# Altium PCB nPOC-BB_beta_heater-board.PcbDoc
Units mm, origin at the board's own origin, x right, y up, seen from the top; angles counter-clockwise.
Board outline 31.75 x 55.17 mm, 2 copper layers (Top Layer, Bottom Layer), stack 1.524 mm thick; 3 components, 5 nets, 73 pads, 12 vias.
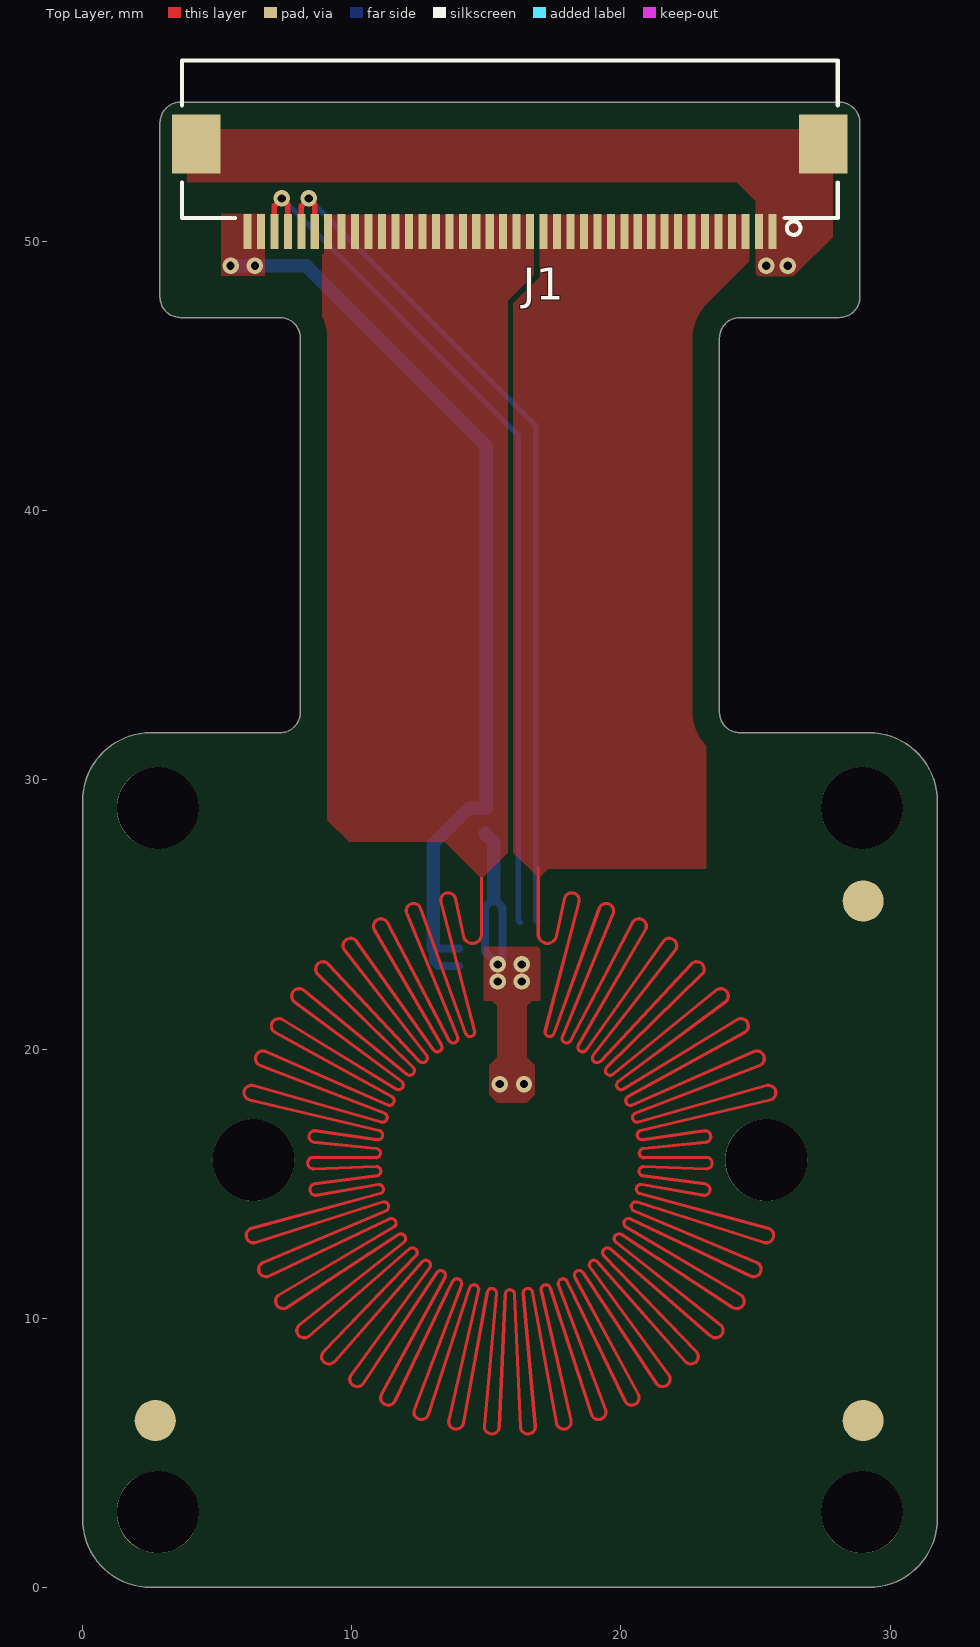
[diagram p0: Top Layer view]
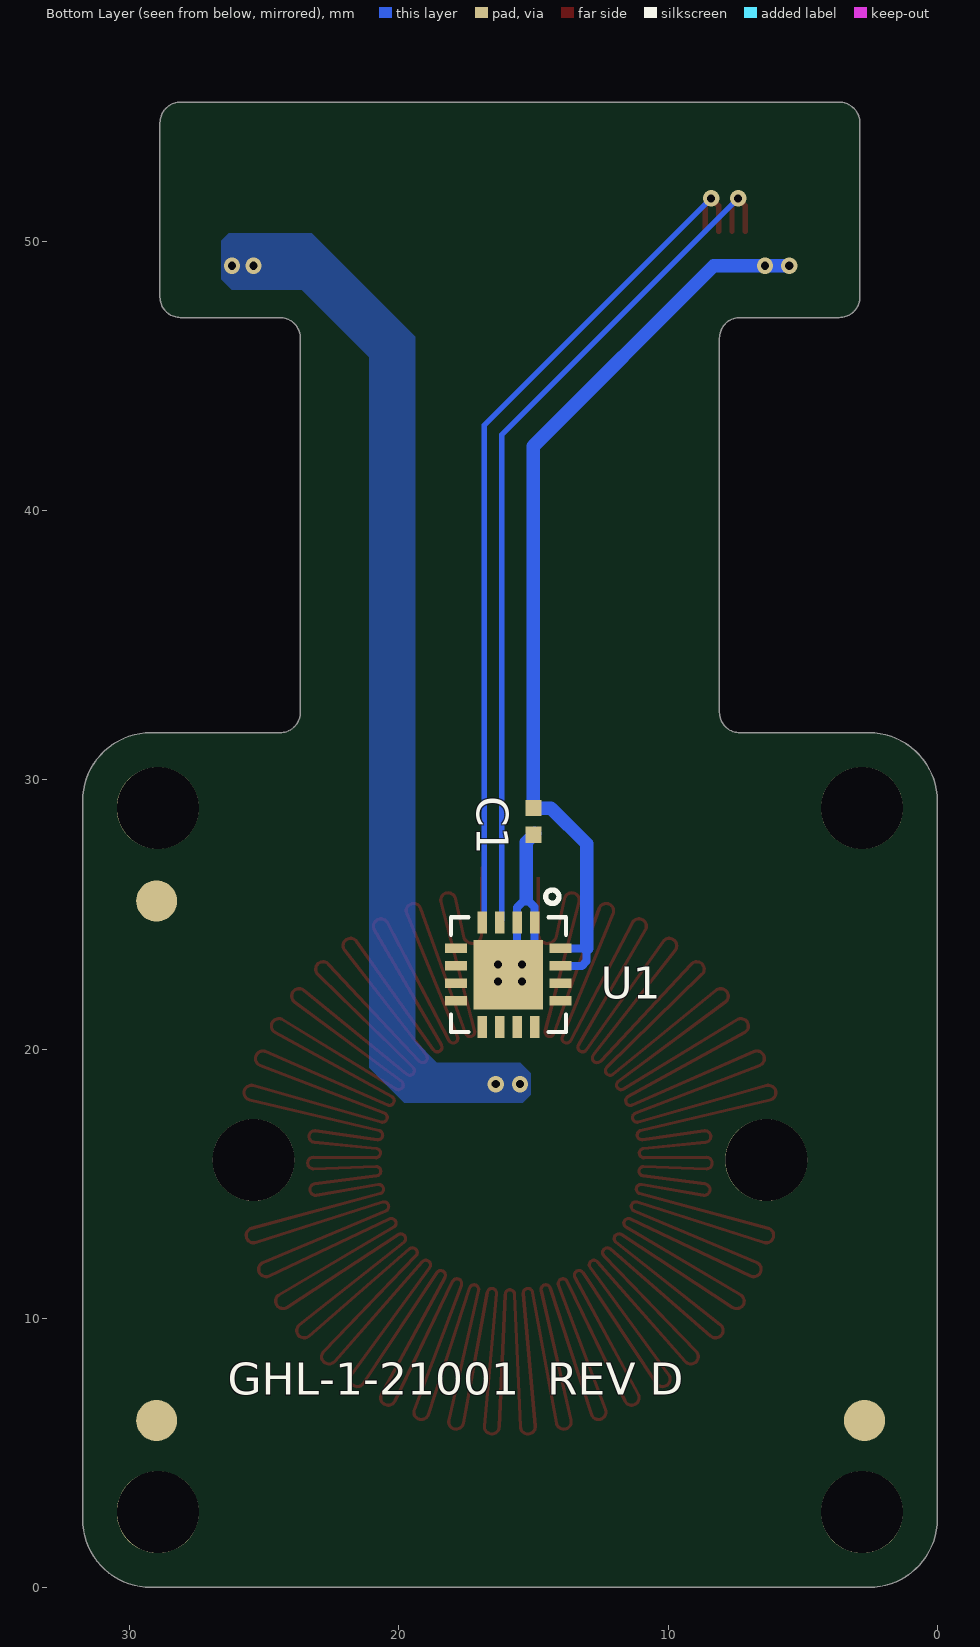
[diagram p1: Bottom Layer view, seen from below]

## Layer stack, top to bottom
Top Solder Mask: solder mask 0.0254, SM-003, Dk 4
Top Layer: signal copper 0.035
Dielectric 1: prepreg 1.4542, PP-023, Dk 4.5
Bottom Layer: signal copper 0.035
Bottom Solder Mask: solder mask 0.0254, SM-001, Dk 4

## Board outline
0,2.54 ccw(c2.54,2.54) 2.54,0 29.21,0 ccw(c29.21,2.54) 31.75,2.54 31.75,29.21 ccw(c29.21,29.21) 29.21,31.75 24.422,31.75 cw(c24.422,32.512) 23.66,32.512 23.66,46.412 cw(c24.422,46.412) 24.422,47.174 28.113,47.174 ccw(c28.113,47.936) 28.875,47.936 28.875,54.412 ccw(c28.113,54.412) 28.113,55.174 3.637,55.174 ccw(c3.637,54.412) 2.875,54.412 2.875,47.936 ccw(c3.637,47.936) 3.637,47.174 7.328,47.174 cw(c7.328,46.412) 8.09,46.412 8.09,32.512 cw(c7.328,32.512) 7.328,31.75 2.54,31.75 ccw(c2.54,29.21) 0,29.21

## Design rules (kind name [scope] priority, off if disabled: settings)
BoardOutlineClearance [All] p1: gap=1 ignorepadtopadclearanceinfootprint=FALSE except(0: Arc-SplitContinuation Track-SplitContinuation SMDPad-SplitContinuation THPad-SplitContinuation Via-SplitContinuation Fill-SplitContinuation Poly-SplitContinuation Region-SplitContinuation Text-SplitContinuation; 0.864: Track-OutlineEdge Via-OutlineEdge)
Clearance [All] p1: gap=0.203 ignorepadtopadclearanceinfootprint=FALSE except(0.381: Arc-Hole Track-Hole SMDPad-Hole THPad-Hole Via-Hole Fill-Hole Poly-Hole Region-Hole Text-Hole)
HoleSize [All] p1: absolutevalues=TRUE maxlimit=5.08 minlimit=0.025 maxpercent=80.000 minpercent=20.000
MinimumSolderMaskSliver [All] p1: minsoldermaskwidth=0.102
PolygonConnect PolygonConnect_2 [All vs IsNamedPolygon('NONET_L-01_P-001')] p1: thpad.connectstyle=Relief thpad.reliefconductorwidth=0.254 thpad.reliefentries=4 thpad.polygonreliefangle="90 Angle" thpad.airgapwidth=0.254 smdpad.connectstyle=Direct smdpad.reliefconductorwidth=0.254 smdpad.reliefentries=4 smdpad.polygonreliefangle="90 Angle" smdpad.airgapwidth=0.254 via.connectstyle=Direct via.reliefconductorwidth=0.254 via.reliefentries=4 via.polygonreliefangle="90 Angle" via.airgapwidth=0.254
PolygonConnect PolygonConnect_1 [All vs IsNamedPolygon('GND_L02_P000')] p2: thpad.connectstyle=Relief thpad.reliefconductorwidth=0.254 thpad.reliefentries=4 thpad.polygonreliefangle="90 Angle" thpad.airgapwidth=0.254 smdpad.connectstyle=Direct smdpad.reliefconductorwidth=0.254 smdpad.reliefentries=4 smdpad.polygonreliefangle="90 Angle" smdpad.airgapwidth=0.254 via.connectstyle=Direct via.reliefconductorwidth=0.254 via.reliefentries=4 via.polygonreliefangle="90 Angle" via.airgapwidth=0.254
PolygonConnect [All] p3: connectstyle=Relief reliefconductorwidth=0.254 reliefentries=4 polygonreliefangle="90 Angle" airgapwidth=0.254
RoutingVias [All] p1: holewidth=0.305 width=0.61 viastyle="Through Hole" minholewidth=0.305 minwidth=0.61 maxholewidth=0.305 maxwidth=0.61
SilkToSilkClearance [All] p1: silktosilkclearance=0.102
SilkToSolderMaskClearance [IsPad] p1: minsilkscreentomaskgap=0.102 clearancetoexposedcopper=TRUE
SolderMaskExpansion [All] p1: expansion=0.064 istentingtop=FALSE
SupplyNets "Schematic Supply Nets_1" [InNet('VDD')] p1: voltage=0.000
SupplyNets "Schematic Supply Nets" [InNet('GND')] p2: voltage=0.000
Width [All] p1: maxlimit=1.27 minlimit=0.102 preferedwidth=0.203 minimp=50.000000 maximp=50.000000 favimp=50.000000
26 further rules are at their usual default settings.

## Components (designator, comment, footprint, x,y, rotation, side; value= is the part's Value field where it differs from the comment)
C1 "100nF" C0402 15,28.46 r90 bottom
J1 "FH12A-40S-0.5SH(55)" hirose_fh12a-40s-0p5sh55 15.875,53.8 r0 top
U1 "G-NICO-018" QFN16_4X4_P65mm 15.932,22.762 r270 bottom

## Footprints (in the part's own frame and the unit in brackets; to place one, negate y for a bottom-side part, rotate by r counter-clockwise, add the part's x,y. Pads: shape width x height; smd on the part's side, far side on the other; paste and mask are expansions set on the pad)
C0402 [mil] "C0402"
  rect 23.62x23.62 smd: 1(-19.69,0) 2(19.68,0)
  body extent -20,-10 20,10, height 14
hirose_fh12a-40s-0p5sh55 [mm] "Hirose FH12A Series 0.5mm pitch top contact FPC/FFC 40pin"
  rect 0.3x1.3 smd: 1(9.75,-3.429) 2(9.25,-3.429) 3(8.75,-3.429) 4(8.25,-3.429) 5(7.75,-3.429) 6(7.25,-3.429) 7(6.75,-3.429) 8(6.25,-3.429) 9(5.75,-3.429) 10(5.25,-3.429) 11(4.75,-3.429) 12(4.25,-3.429) 13(3.75,-3.429) 14(3.25,-3.429) 15(2.75,-3.429) 16(2.25,-3.429) 17(1.75,-3.429) 18(1.25,-3.429) 19(0.75,-3.429) 20(0.25,-3.429) 21(-0.25,-3.429) 22(-0.75,-3.429) 23(-1.25,-3.429) 24(-1.75,-3.429) 25(-2.25,-3.429) 26(-2.75,-3.429) 27(-3.25,-3.429) 28(-3.75,-3.429) 29(-4.25,-3.429) 30(-4.75,-3.429) 31(-5.25,-3.429) 32(-5.75,-3.429) 33(-6.25,-3.429) 34(-6.75,-3.429) 35(-7.25,-3.429) 36(-7.75,-3.429) 37(-8.25,-3.429) 38(-8.75,-3.429) 39(-9.25,-3.429) 40(-9.75,-3.429)
  rect 1.8x2.2 smd: 41(-11.646,-0.178) 42(11.646,-0.178)
  silkscreen extent -12.18,-3.56 12.18,2.92, body extent -12.25,-4.06 12.25,2.94, height 2.05
QFN16_4X4_P65mm [mil] "QFN 16 pin 4x4mm 0.65 pin pitch 0.9 Height"
  rect 32x14 smd: 1(-76.5,38.39) 2(-76.5,12.8) 3(-76.5,-12.8) 4(-76.5,-38.39) 9(76.5,-38.39) 10(76.5,-12.8) 11(76.5,12.8) 12(76.5,38.39)
  rect 14x32 smd: 5(-38.39,-76.5) 6(-12.8,-76.5) 7(12.8,-76.5) 8(38.39,-76.5) 13(38.39,76.5) 14(12.8,76.5) 15(-12.8,76.5) 16(-38.39,76.5)
  rect 102x102 smd paste-50.5 mask+0: 17(0,0)
  silkscreen extent -124,-84 84,84, body extent -80,-80 80,80, height 35

## Part data
C1: library part CMP-00446-1, "Ceramic capacitor SMD 0402 100nF 16V X7R 10%", Case Code (Imperial)=0402, Case Code (Metric)=1005, Dielectric=X7R, Max Operating Temperature=125°C, Min Operating Temperature=-55°C, Package Quantity=1, Tolerance=10%, Voltage=16V, Case/Package=0402, Construction=Flat, Contact Plating=Tin, Depth=0.5mm, Height=0.5mm, Install=POP, Lead Free="Lead Free", Length=1mm, Material=Ceramic, Mounting Technology="Surface Mount", Packaging="Tape and Reel", Radiation Hardening=No, RoHS Compliant=Yes, Series=CL, Thickness=0.022inch, Voltage Rating=16V, Voltage Rating (DC)=16V, Width=0.02inch
J1: library part CMP-002-00023-3, "Conn Ffc/fpc Connector Skt 40 Pos 0.5MM Solder Ra SMD T/r / Conn Ffc Top 40POS 0.50MM R/a", Actuator Color=Brown, Color=Beige,Brown, Contact Resistance=50mR, Contact Voltage Rating (AC)=50V, Current Rating=500mA, Flammability Rating="UL94 V-0", Housing Color=Beige, Insulation Resistance=500MR, Max Current Rating=400mA, Max Operating Temperature=70°C, Min Operating Temperature=-40°C, Package Quantity=2000, Actuator Material=Polyphenylene, Connector Type=Receptacle, Contact Location=Top, Contact Material=Bronze, Contact Pitch=500um, Contact Plating=Gold, Depth=6.2mm, Gender=Female, Housing Material=Polyamide, Lead Free="Lead Free", Lead Pitch=0.5mm, Length=24.5mm, Material=Polyamide, Mating Cycles=20, Max Voltage Rating (AC)=50V, Mounting Technology="Surface Mount", Number of Contacts=40, Number of Positions=40, Number of Rows=1, Orientation="Right Angle", Packaging="Tape and Reel", Pitch=0.5mm, Radiation Hardening=No, Reach SVHC Compliant=No, RoHS Compliant=Yes, Series=FH12, Termination=Solder, Voltage Rating=50V, Voltage Rating (AC)=50V, Width=24.1mm, Wire/Cable Type=Straight
U1: library part CMP-00069-3, "TSYS01 Series 3.6 V -40 to +125 SMT Digital Temperature Sensor - QFN-16", Case/Package=QFN, Max Operating Temperature=125°C, Max Supply Current=12.5uA, Min Operating Temperature=-40°C, Operating Supply Voltage=3.6V, Height=0.85mm, Lead Free="Lead Free", Length=4mm, RoHS Compliant=Yes, Sensor Type=Temperature, Width=0.157inch

## Free pads (board coordinates)
  round 1.524 smd far side paste-2539.97 mask+0.508: 1(2.7,6.2) 1(29,6.2) 1(29,25.5)
  round 1.524 smd paste-2539.97 mask+0.508: 1(2.7,6.2) 1(29,6.2) 1(29,25.5)
  round 3.048 hole 3.048 unplated: 2(2.794,2.794) 2(2.794,28.956) 2(6.35,15.875) 2(25.4,15.875) 2(28.956,2.794) 2(28.956,28.956)

## Via types
v1: diameter 0.61, hole 0.305, Top Layer to Bottom Layer, tented both sides, 12 vias

## Nets (pads, with @x,y where several pads share a name; then routed paths per layer and width w, separated by ;. In a path a pad name is that pad's centre, name@x,y a point inside that pad or via, vN(x,y) a via of type N, cw(c..) or ccw(c..) an arc to the next point about the centre after c; other vN are vias at no path point)
GND: C1.1 J1.1 J1.2 J1.41 J1.42 U1.1 U1.2 U1.17 | length 8
  Bottom Layer w0.3: U1.17@14.957,23.61 v1(15.424,23.143) 15.607,23.326 U1.2 15.607,25.253 15.272,25.588 14.957,25.273 U1.1 U1.17@14.957,23.61
  Bottom Layer w0.5: C1.1@14.95,28 14.95,28.01 15.272,27.688 15.272,25.588
  other v1: 15.5,18.7 16.4,18.7 15.424,22.508 16.313,22.508 16.313,23.143 25.4,49.1 26.2,49.1
HEATER_N: J1.3 J1.4 J1.5 J1.6 J1.7 J1.8 J1.9 J1.10 J1.11 J1.12 J1.13 J1.14 J1.15 J1.16 J1.17 J1.18 J1.19 J1.20 J1.21 J1.22 J1.23 J1.24 J1.25 J1.26 J1.27 J1.28 J1.29 J1.30 J1.31 J1.32 J1.33 J1.34 | length 0.4
  Top Layer w0.102: 16.925,26.375 16.925,26.725
I2C0_SCLK: J1.37 J1.38 U1.3 | length 33.2
  Top Layer w0.203: J1.38 7.125,51.325 v1(7.4,51.6) 7.531,51.469 7.531,51.466 7.625,51.372 J1.37
  Bottom Layer w0.203: v1(7.4,51.6) 16.181,42.819 16.181,24.781 U1.3
I2C0_SDA: J1.35 J1.36 U1.4 | length 33.1
  Top Layer w0.203: J1.36 8.125,51.325 v1(8.4,51.6) 8.625,51.375 J1.35
  Bottom Layer w0.203: v1(8.4,51.6) 16.831,43.169 16.831,24.781 U1.4
VDD: C1.2 J1.39 J1.40 U1.15 U1.16 | length 34.6
  Bottom Layer w0.305: U1.15 13.203,23.087 13.025,23.266 13.025,23.737 U1.16
  Bottom Layer w0.5: v1(5.5,49.1) v1(6.4,49.1) 8.3,49.1 15,42.4 C1.2 14.99,28.95 14.35,28.95 13.025,27.625 13.025,23.737
pads on no net: U1.5 U1.6 U1.7 U1.8 U1.9 U1.10 U1.11 U1.12 U1.13 U1.14

## Polygon pours and split planes (outlines as drawn)
HEATER_N on Top Layer "NONET_L-01_P-001" (solid, remove dead copper, pour order 6): 16.77,51 16.77,48.77 15.8,47.8 15.8,27.3 14.875,26.375 14.773,26.375 13.448,27.7 9.9,27.7 9.099,28.501 9.099,32.512 8.9,32.512 8.9,51
VDD on Top Layer "NONET_L-01_P-001" (solid, remove dead copper, pour order 9): 5.15,51.025 5.15,48.725 6.77,48.725 6.77,51.025
GND on Top Layer "NONET_L-01_P-001" (solid, remove dead copper, pour order 11): 24.3,52.2 25,51.5 25,49.5 25,48.8 25.1,48.7 26.4,48.7 26.5,48.8 28.4,50.7 28.4,54.7 3.5,54.7 3.5,52.2
HEATER_N on Top Layer "NONET_L-01_P-001" (solid, remove dead copper, pour order 7): 16.977,50.998 16.977,48.674 16.001,47.698 16.001,27.299 16.925,26.375 16.977,26.375 17.3,26.698 23.201,26.698 23.163,26.736 23.163,47.663 24.77,49.27 24.77,50.998
GND on Top Layer "NONET_L-01_P-001" (solid, remove dead copper, pour order 4): 16.7,21.8 16.5,21.6 16.5,19.7 16.8,19.4 16.8,18.3 16.5,18 15.4,18 15.1,18.3 15.1,19.4 15.4,19.7 15.4,21.6 15.2,21.8 14.9,21.8 14.9,23.8 17,23.8 17,21.8
GND on Bottom Layer "NONET_L-01_P-001" (solid, remove dead copper, pour order 8): 21.1,19.3 19.8,18 15.4,18 15.1,18.3 15.1,19.1 15.5,19.5 18.6,19.5 19.4,20.3 19.4,46.461 23.239,50.3 26.32,50.3 26.6,50.02 26.6,48.6 26.2,48.2 23.6,48.2 21.1,45.7

## Other copper
Top Layer:
  region net HEATER_N: 361 vertices and 0 holes, not listed, extent 5.947,5.648 25.803,26.375
  text "PRIMARY SIDE - LAYER 1" at -0.207,-24.115 h2.54
Bottom Layer:
  text "SECONDARY SIDE - LAYER 2" at -0.146,-23.973 h2.54

## Silkscreen, mask and mechanical layers (free items; w line width, h text height)
Top Silk Screen:
  text "PRIMARY SIDE SILK SCREEN" at 1.049,-24.115 h2.54
Bottom Silk Screen:
  text "GHL-1-21001  REV D" at 26.35,7.15 h1.2
  text "SECONDARY SIDE SILK SCREEN" at 0.795,-24.115 h2.54
Top Paste:
  text "PRIMARY SIDE SOLDER PASTE" at 1.049,-24.115 h2.54
Bottom Paste:
  text "SECONDARY SIDE SOLDER PASTE" at 0.854,-24.046 h2.54
Top Solder Mask:
  text "PRIMARY SIDE SOLDER MASK" at 1.303,-24.115 h2.54
Bottom Solder Mask:
  text "SECONDARY SIDE SOLDER MASK" at 0.795,-24.115 h2.54
Mechanical 1-DXF_091624-Bottom:
  drawing of 18973 lines, arcs and shapes, not listed
Title_Block:
  lines w0.013: 31.75,2.54 31.75,29.21
  text "ODIC, INC." at 0.029,-9.114 h2.54
  text "GHL NAATOS Sample Prep Heater Board" at -0.246,-13.827 h2.54
  text "263-03-001 REV D" at -0.207,-19.035 h2.54
Board_Outline:
  the board outline again, w0.013
Mechanical 13 -DXF_080824:
  circle w0.025: c15.9,15.9 r6.718
  circle w0.025: c15.9,15.9 r9.5
  circle w0.013: c2.794,2.794 r1.524
  circle w0.013: c28.956,2.794 r1.524
  circle w0.013: c28.956,28.956 r1.524
  circle w0.013: c2.794,28.956 r1.524
  circle w0.013: c6.35,15.875 r1.524
  circle w0.013: c25.4,15.875 r1.524
  lines w0.013: 8.625,50.174 8.625,51.289 cw(c8.825,51.289) 8.825,51.489 10.59,51.489 10.59,50.174 ; 8.625,50.439 9.675,50.439 ; 9.675,50.174 9.675,51.489 ; 9.675,50.438 9.958,50.174 ; 10.29,50.174 10.29,51.489 ; 21.16,50.174 21.16,51.489 22.925,51.489 cw(c22.925,51.289) 23.125,51.289 23.125,50.174 ; 21.46,50.174 21.46,51.489 ; 21.792,50.174 22.075,50.438 ; 22.075,50.174 22.075,51.489 ; 22.075,50.439 23.125,50.439 ; 0,0.508 ccw(c0.508,0.508) 0.508,0 31.242,0 ccw(c31.242,0.508) 31.75,0.508 31.75,31.242 ccw(c31.242,31.242) 31.242,31.75 24.422,31.75 cw(c24.422,32.512) 23.66,32.512 23.66,49.666 ccw(c23.152,49.666) 23.152,50.174 8.598,50.174 ccw(c8.598,49.666) 8.09,49.666 8.09,32.512 cw(c7.328,32.512) 7.328,31.75 0.508,31.75 ccw(c0.508,31.242) 0,31.242 0,0.508 ; 14.875,24.4 16.875,24.4 16.875,26.4 14.875,26.4 14.875,24.4 ; 16.575,24.55 cw(c16.575,24.7) 16.575,24.85 cw(c16.575,24.7) 16.575,24.55
  lines w0.02: 2.85,12.35 11.15,20.65 19.45,28.95 ; 2.85,19.45 11.15,11.15 19.45,2.85 ; 7.6,7.6 15.9,15.9 ; 7.6,24.2 15.9,15.9 ; 12.35,2.85 20.65,11.15 ; 12.35,28.95 20.65,20.65 28.95,12.35 ; 15.7,15.9 16.1,15.9 ; 15.9,15.7 15.9,16.1 ; 20.647,11.147 28.947,19.447 ; 24.2,7.6 15.9,15.9 ; 24.2,24.2 15.9,15.9 ; 15.9,15.9 15.9,15.9 ; 15.9,15.9 15.9,15.9
Mechanical 14-DXF_091624-Top:
  drawing of 3866 lines, arcs and shapes, not listed